# Altium PCB LDO.PcbDoc
Units mil, origin at the board's own origin, x right, y up, seen from the top; angles counter-clockwise.
Board outline 1030 x 615 mil, 2 copper layers (Top Layer, Bottom Layer); 7 components, 6 nets, 17 pads, 53 vias.
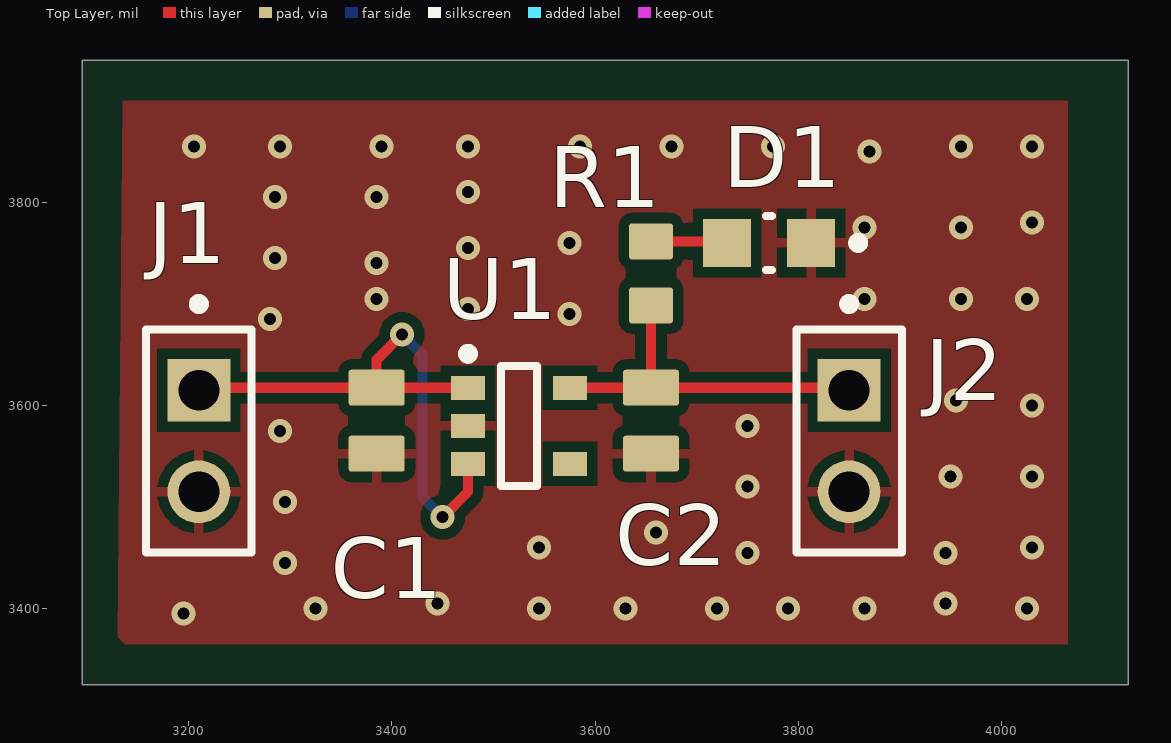
[diagram p0: Top Layer view]
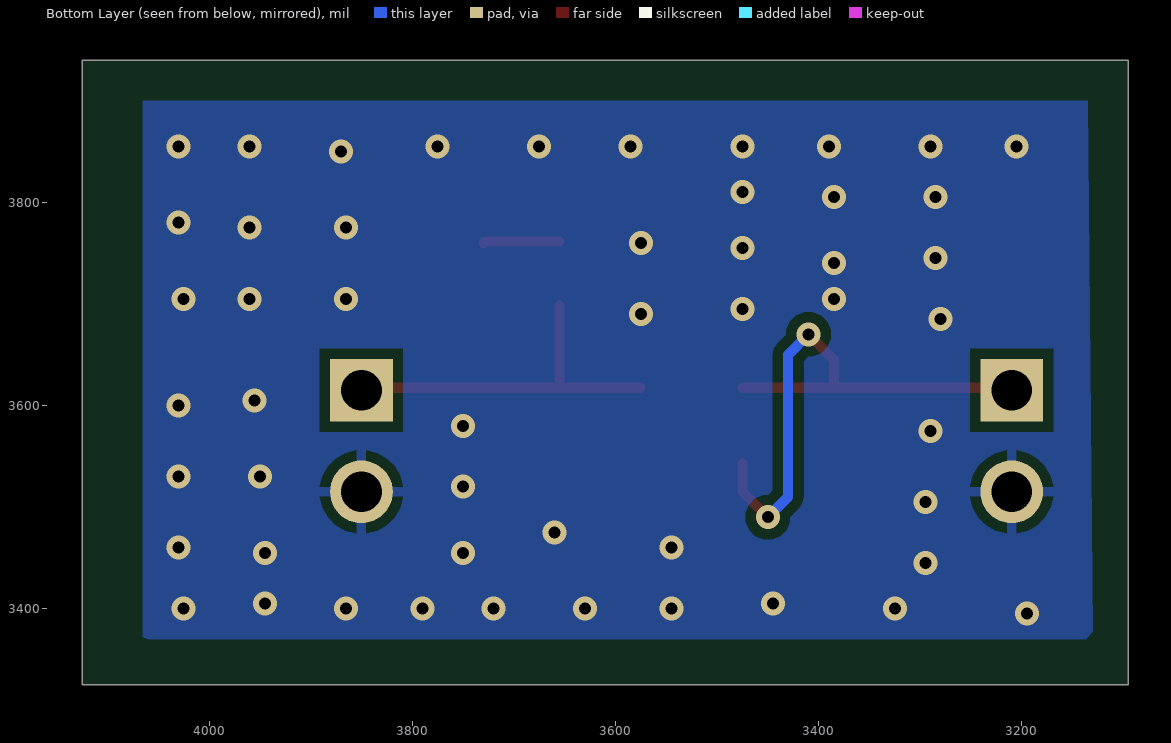
[diagram p1: Bottom Layer view, seen from below]
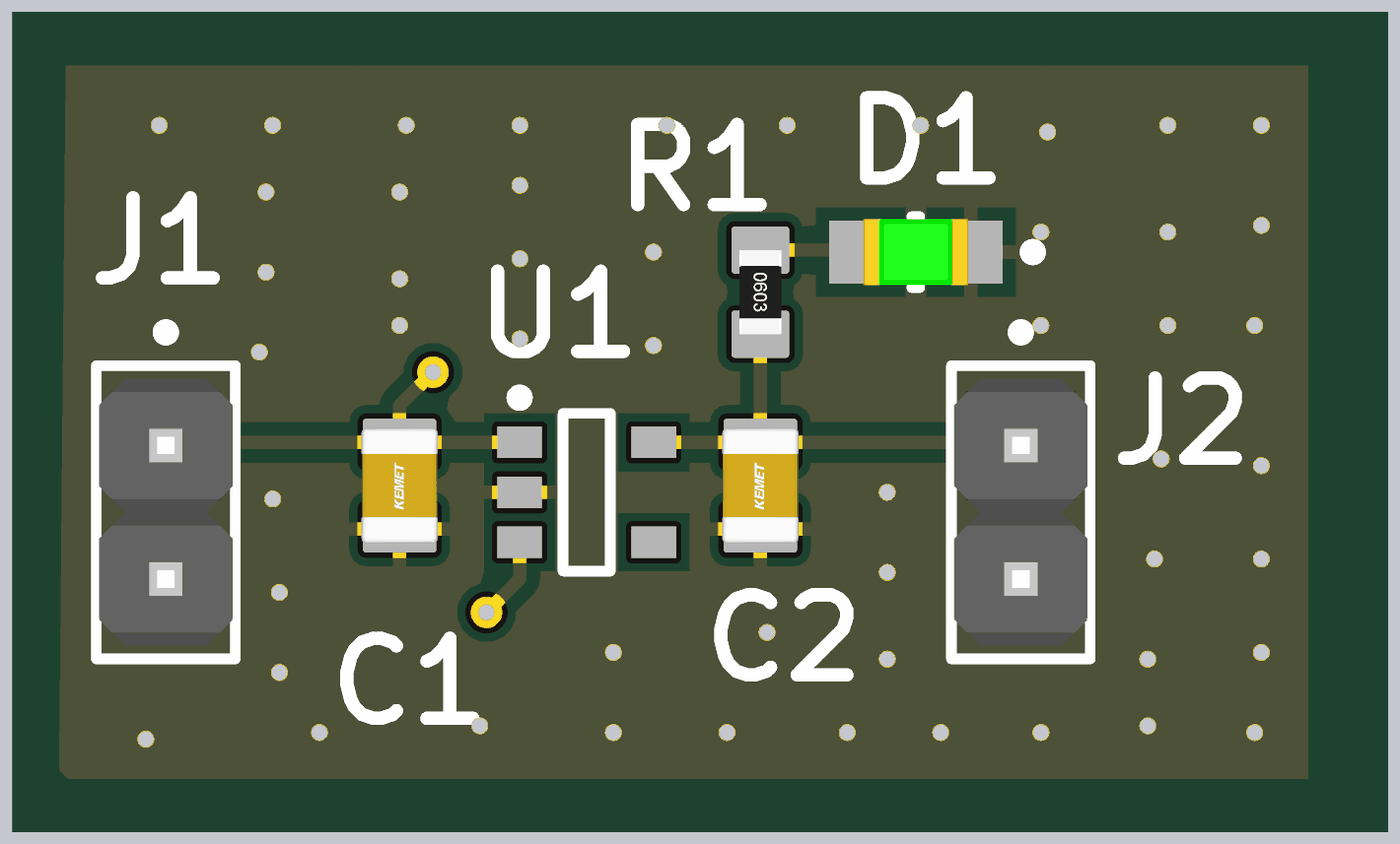
[diagram p2: 3D render of the assembled board from above, using the file's embedded part models]

## Layer stack, top to bottom
Top Solder: solder mask 0.4, Solder Resist, Dk 3.5
Top Layer: signal copper 1.4
Dielectric 1: dielectric 12.6, FR-4, Dk 4.8
Bottom Layer: signal copper 1.4
Bottom Solder: solder mask 0.4, Solder Resist, Dk 3.5

## Board outline
3095,3325 3095,3940 4125,3940 4125,3325

## Design rules (kind name [scope] priority, off if disabled: settings)
Clearance [All] p1: gap=10 ignorepadtopadclearanceinfootprint=FALSE
MinimumSolderMaskSliver [All] p1: minsoldermaskwidth=5
PolygonConnect [All] p1: connectstyle=Relief reliefconductorwidth=10 reliefentries=4 polygonreliefangle="90 Angle" airgapwidth=10
RoutingVias [All] p1: holewidth=28 width=50 viastyle="Through Hole" minholewidth=28 minwidth=50 maxholewidth=28 maxwidth=50
SolderMaskExpansion [All] p1: expansion=4 istentingtop=FALSE
SupplyNets "Schematic Supply Nets_1" [InNet('GND')] p1: voltage=0.000
Width [All] p1: maxlimit=10 minlimit=10 preferedwidth=10
29 further rules are at their usual default settings.

## Classes and differential pairs
component class LDO: C1 D1 J1 J2 R1 U1

## Components (designator, comment, footprint, x,y, rotation, side; value= is the part's Value field where it differs from the comment)
C1 "GCM21BR71E105KA56L" CAP0805 3385,3585 r90 top value=10μF
C2 "GCM21BR71E105KA56L" CAP0805 3655,3585 r90 top value=10μF
D1 "" FP-LTST-C170GKT-MFG 3771.34,3760 r180 top
J1 "M20-9990246" "FP-M20-9990246-MFG - duplicate"#1 3210,3565 r270 top
J2 "M20-9990246_1" "FP-M20-9990246-MFG - duplicate"#2 3850,3565 r270 top
R1 "RNCP0603FTD10K0" RES0603 3655,3730 r270 top value=120Ω
U1 "MIC5317-3.3YM5-TR" SOT95P245X145-5N 3525,3580 r0 top

## Footprints (in the part's own frame and the unit in brackets; to place one, negate y for a bottom-side part, rotate by r counter-clockwise, add the part's x,y. Pads: shape width x height; smd on the part's side, far side on the other; paste and mask are expansions set on the pad)
CAP0805 [mm] "Chip Capacitor, Body 2.0x1.2mm, Height 0.45mm, IPC Medium Density"
  rrect15% 0.9x1.4 smd: 1(-0.825,0) 2(0.825,0)
  body extent -1.1,-0.73 1.1,0.72, height 1.39
FP-LTST-C170GKT-MFG [mm]
  rect 1.2x1.2 smd paste+0 mask+0: 1(-1.05,0) 3(1.05,0)
  silkscreen extent -2.35,-0.67 0.07,0.67, body extent -1.75,-0.77 1.75,0.77, height 0.25
"FP-M20-9990246-MFG - duplicate"#1 [mm]
  rect 1.57x1.57 hole 1.02 paste-2539.97 mask+0: 1(-1.27,0)
  round 1.57 hole 1.02 paste-2539.97 mask+0: ""(1.27,0)
  silkscreen extent -3.55,-1.32 2.79,1.32, body extent -2.89,-1.42 2.89,1.42, height 0.25
"FP-M20-9990246-MFG - duplicate"#2 [mm]
  rect 1.57x1.57 hole 1.02 paste-2539.97 mask+0: 1(-1.27,0)
  round 1.57 hole 1.02 paste-2539.97 mask+0: 2(1.27,0)
  silkscreen extent -3.55,-1.32 2.79,1.32, body extent -2.89,-1.42 2.89,1.42, height 0.25
RES0603 [mm] "Chip Resistor, Body 1.6x0.8mm, IPC Medium Density"
  rrect15% 0.9x1.1 smd: 1(-0.8,0) 2(0.8,0)
  body extent -0.8,-0.4 0.8,0.4, height 0.46
SOT95P245X145-5N [mm] "SOT23, 5-Leads, Body 2.90x2.45mm, Pitch 0.95mm, IPC Medium Density"
  rect 0.85x0.6 smd: 1(-1.275,0.95) 2(-1.275,0) 3(-1.275,-0.95) 4(1.275,-0.95) 5(1.275,0.95)
  silkscreen extent -1.4,-1.5 0.45,1.92, body extent -0.85,-1.5 0.85,1.5, height 1.45

## Part data
C1 C2: "CAP CER 1UF 25V X7R 0805", Manufacturer 1=Murata, Supplier Part Number 1=490-4785-1-ND, Voltage Rating=25V, Class=X5R, Manufacturer Part Number 1=GCM21BR71E105KA56L, Supplier 1=Digi-Key
D1: library part LTST-C170GKT, "LED GREEN CLEAR SMD", Manufacturer 1="Lite-On Inc.", Supplier Part Number=160-1179-2-ND, Manfacturer Part Number=LTST-C170GKT, Supplier=DigiKey
J1: "CONN HEADER VERT 2POS 2.54MM", Manufacturer="Harwin Inc.", Supplier Part Number=952-2262-ND, Manufacturer Part Number=M20-9990246, Supplier=DigiKey
J2: "CONN HEADER VERT 2POS 2.54MM", Manufacturer="Harwin Inc.", Manufacturer Part Number=M20-9990246, Supplier Part Number=952-2262-ND, Supplier=DigiKey
R1: "RES 10K OHM 1% 1/8W 0603", Manufacturer 1="Stackpole Electronics Inc", Power Rating=1/8W, Supplier Part Number 1=RNCP0603FTD10K0CT-ND, Manufacturer Part Number 1=RNCP0603FTD10K0, Supplier 1=Digi-Key
U1: "C REG LINEAR 3.3V 150MA SOT23-5", Manufacturer="Microchip Technology", Supplier Part Number=MIC5317-3.3YM5-TR-ND, Manufacturer Part Number=MIC5317-3.3YM5-TR, Supplier=Digikey

## Via types
v1: diameter 23.62, hole 11.81, Top Layer to Bottom Layer, tented both sides, 51 vias
v2: diameter 23.62, hole 11.81, Top Layer to Bottom Layer, 2 vias

## Nets (pads, with @x,y where several pads share a name; then routed paths per layer and width w, separated by ;. In a path a pad name is that pad's centre, name@x,y a point inside that pad or via, vN(x,y) a via of type N, cw(c..) or ccw(c..) an arc to the next point about the centre after c; other vN are vias at no path point)
GND: C1.1 C2.1 D1.1 J1. J2.2 U1.2
  other v1: 3195,3395 3325,3400 3545,3400 3630,3400 3720,3400 3790,3400 3865,3400 4025,3400 3445,3405 3945,3405 3295,3445 3750,3455 3945,3455 3545,3460 4030,3460 3660,3475 3295,3505 3750,3520 3950,3530 4030,3530 3290,3575 3750,3580 4030,3600 3955,3605 3280,3685 3575,3690 3475,3695 3385,3705 3865,3705 3960,3705 4025,3705 3385,3740 3285,3745 3475,3755 3575,3760 3865,3775 3960,3775 4030,3780 3285,3805 3385,3805 3475,3810 3870,3850 3205,3855 3290,3855 3390,3855 3475,3855 3585,3855 3675,3855 3775,3855 3960,3855 4030,3855
GND2: 
GND3: 
LED: D1.3 R1.1 | length 75.6
  Top Layer w10: R1.1 3728.5,3761.5 D1.3
VIN(5.5V): C1.2 J1.1 U1.1 U1.3 | length 588.2
  Top Layer w10: J1.1 3212.48,3617.48 C1.2 ; v2(3410,3670) 3385,3645 C1.2 ; v2(3450,3490) 3474.8,3514.8 U1.3 ; U1.1 3385.08,3617.4 C1.2
  Bottom Layer w10: v2(3410,3670) 3430,3650 3430,3510 v2(3450,3490)
VOUT(3.3V): C2.2 J2.1 R1.2 U1.5 | length 356.9
  Top Layer w10: U1.5 3654.92,3617.4 C2.2 ; R1.2 C2.2 ; J2.1 3847.52,3617.48 C2.2
pads on no net: U1.4

## Polygon pours and split planes (outlines as drawn)
GND on Top Layer "GND_L01_P000" (solid, remove dead copper, pour order 0): 3135,3900 4065,3900 4065,3365 3130,3365
GND on Bottom Layer "3" (solid, pour order 1): 3135,3900 4065,3900 4065,3365 4060,3370 3130,3370

## Silkscreen, mask and mechanical layers (free items; w line width, h text height)
Mechanical 1:
  lines w10: 3095,3335 3105,3325 4115,3325 4125,3335 4125,3930 4115,3940 3105,3940 3095,3930 3095,3335